# Altium PCB USB_Oscilloscope.PcbDoc (part 2 of 2)
Units mm, origin at the board's own origin, x right, y up, seen from the top; angles counter-clockwise.
Board outline 100 x 70 mm, 4 copper layers (SIG+PWR, Int1 (GND), Int2 (GND), SIG+PWR2), stack 1.369 mm thick; 112 components, 74 nets, 396 pads, 75 vias.
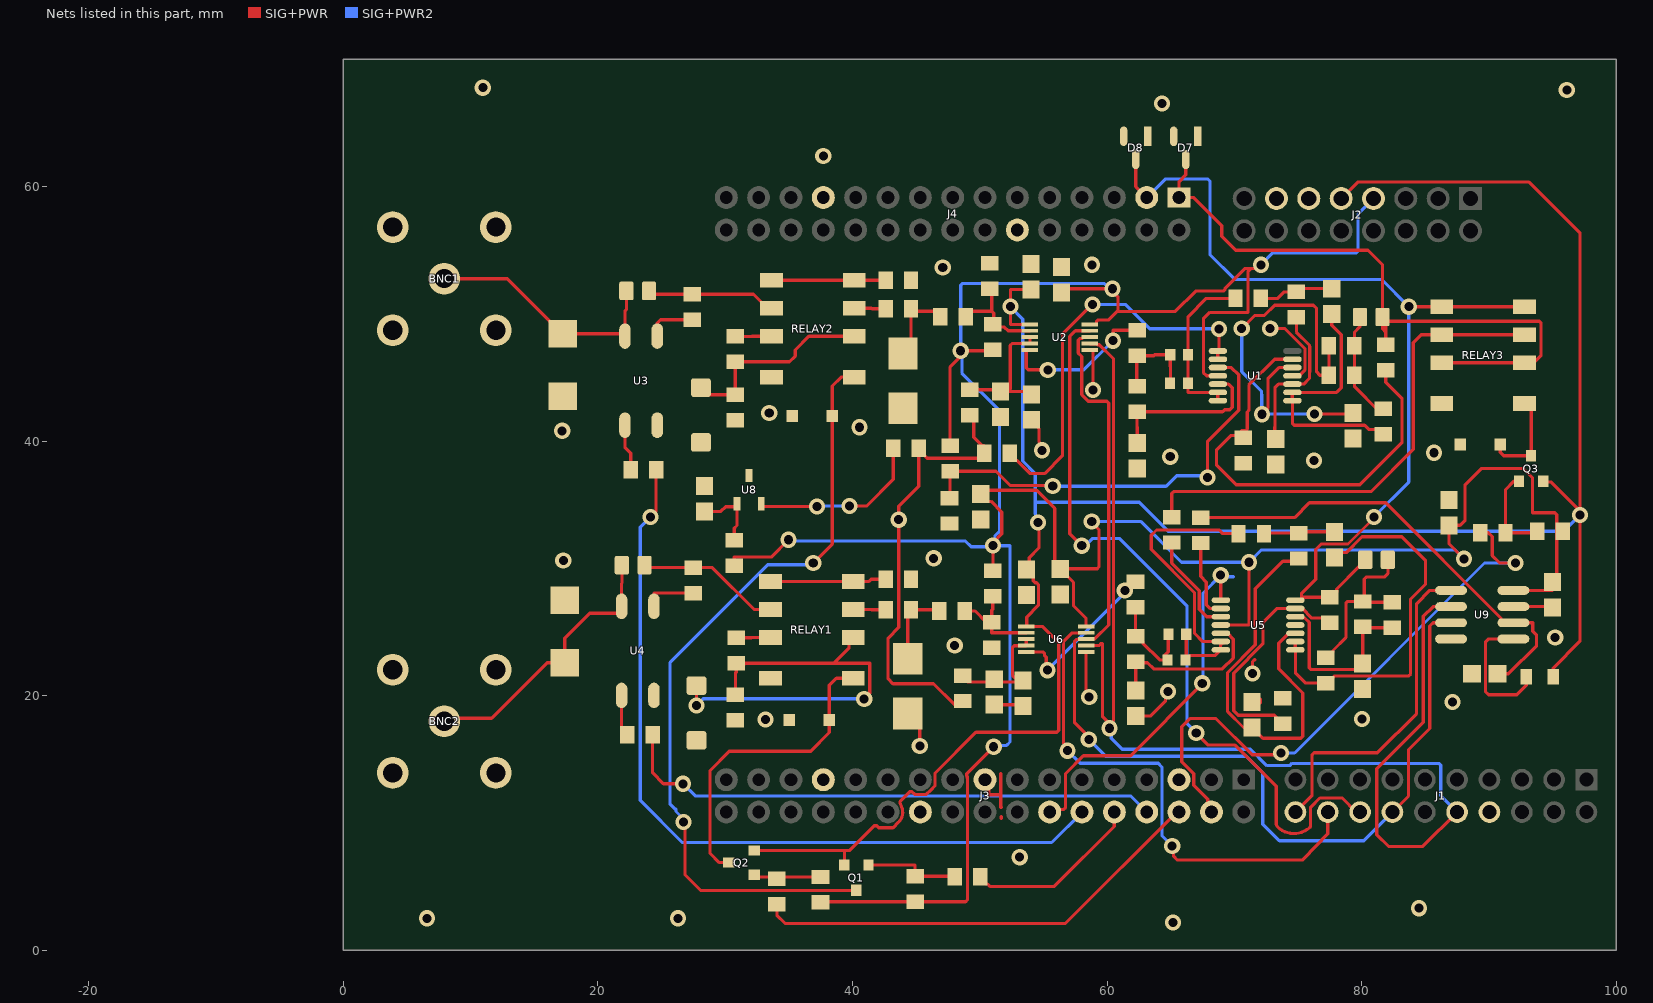
[diagram p4: the nets of this part, all layers, seen from the top]

## Part data (continued)
R17 R18 R36 R48: library part CMP-016-000011-1, "Type:Thick Film Resistor Resistance:34kΩ Tolerance:±1% Tolerance:±1% Power(Watts):125mW Voltage-Supply(Max):150V Temperature Coefficient:±100ppm/℃ Temperature Coefficient:±100ppm/℃ Operating Temperature:-55℃~+155℃ Operating Temperature:-55℃~+155℃", JLCPCB Part Class="Extended Part", LCSC Part Name="34kΩ ±1% 125mW 厚膜电阻", Manufacturer=FOJAN(富捷), Operating Temperature=-55℃~+155℃, Power(Watts)=125mW, Supplier Part Number=C2933420, Temperature Coefficient=±100ppm/℃, Tolerance=1%, Voltage-Supply(Max)=150V, AddInBom=yes, ConvertToPcb=yes, Datasheet=https://item.szlcsc.com/datasheet/FRC0805F3402TS/3279522.html, Design Item ID=FRC0805F3402TS, Device=FRC0805F3402TS, FootprintName=R0805, Manufacturer Part Number=FRC0805F3402TS, ModelId=b83c7c5430874b8eb2319a65d9433429聨0819f05c4eef4c71ace90d822a990e87, ModelName=R0805_L2.0-W1.3-H0.6, ModelTransform=78.74,51.181,0,0,0,0,0,-0.0005,0, Source=P1.SCHLIB, Supplier Footprint=0805, Symbol=FRC0805F3402TS, Type="Thick Film Resistor"
R19 R28 R30 R34 R37 R40 R41 R43 R45: library part CMP-016-000002-1, "Type:Thick Film Resistor Resistance:10kΩ Tolerance:±1% Tolerance:±1% Power(Watts):125mW Voltage-Supply(Max):150V Temperature Coefficient:±100ppm/℃ Temperature Coefficient:±100ppm/℃ Operating Temperature:-55℃~+155℃ Operating Temperature:-55℃~+155℃", JLCPCB Part Class="Basic Part", LCSC Part Name="10kΩ ±1% 125mW 厚膜电阻", Manufacturer=UNI-ROYAL(厚声), Manufacturer Part Number=0805W8F1002T5E, Operating Temperature=-55℃~+155℃, Power(Watts)=125mW, Supplier Part Number=C17414, Temperature Coefficient=±100ppm/℃, Tolerance=1%, Voltage-Supply(Max)=150V, AddInBom=yes, ConvertToPcb=yes, Datasheet=https://item.szlcsc.com/datasheet/0805W8F1002T5E/18102.html, Design Item ID=0805W8F1002T5E, Device=0805W8F1002T5E, FootprintName=R0805, ModelId=b83c7c5430874b8eb2319a65d9433429聨0819f05c4eef4c71ace90d822a990e87, ModelName=R0805_L2.0-W1.3-H0.6, ModelTransform=78.74,51.181,0,0,0,0,0,-0.0005,0, Source=P1.SCHLIB, Supplier Footprint=0805, Symbol=0805W8F1002T5E, Type="Thick Film Resistor"
R26 R27: library part CMP-016-000010-1, "Type:Thick Film Resistor Resistance:3.01kΩ Tolerance:±1% Tolerance:±1% Power(Watts):125mW Voltage-Supply(Max):150V Temperature Coefficient:±100ppm/℃ Temperature Coefficient:±100ppm/℃ Operating Temperature:-55℃~+155℃ Operating Temperature:-55℃~+155℃", JLCPCB Part Class="Extended Part", LCSC Part Name="3.01kΩ ±1% 125mW 厚膜电阻", Manufacturer=FOJAN(富捷), Manufacturer Part Number=FRC0805F3011TS, Operating Temperature=-55℃~+155℃, Power(Watts)=125mW, Supplier Part Number=C2999485, Temperature Coefficient=±100ppm/℃, Tolerance=1%, Voltage-Supply(Max)=150V, AddInBom=yes, ConvertToPcb=yes, Datasheet=https://item.szlcsc.com/datasheet/FRC0805F3011TS/3476925.html, Design Item ID=FRC0805F3011TS, Device=FRC0805F3011TS, FootprintName=R0805, ModelId=b83c7c5430874b8eb2319a65d9433429聨0819f05c4eef4c71ace90d822a990e87, ModelName=R0805_L2.0-W1.3-H0.6, ModelTransform=78.74,51.181,0,0,0,0,0,-0.0005,0, Source=P1.SCHLIB, Supplier Footprint=0805, Symbol=FRC0805F3011TS, Type="Thick Film Resistor"
R29 R33: library part CMP-016-000013-1, "Type:Thick Film Resistor Resistance:5.76kΩ Tolerance:±1% Tolerance:±1% Power(Watts):125mW Voltage-Supply(Max):150V Temperature Coefficient:±100ppm/℃ Temperature Coefficient:±100ppm/℃ Operating Temperature:-55℃~+155℃ Operating Temperature:-55℃~+155℃", JLCPCB Part Class="Extended Part", LCSC Part Name="5.76kΩ ±1% 125mW 厚膜电阻", Manufacturer=FOJAN(富捷), Manufacturer Part Number=FRC0805F5761TS, Operating Temperature=-55℃~+155℃, Power(Watts)=125mW, Supplier Part Number=C3000533, Temperature Coefficient=±100ppm/℃, Tolerance=1%, Voltage-Supply(Max)=150V, AddInBom=yes, ConvertToPcb=yes, Design Item ID=FRC0805F5761TS, Device=FRC0805F5761TS, FootprintName=R0805, ModelId=b83c7c5430874b8eb2319a65d9433429聨0819f05c4eef4c71ace90d822a990e87, ModelName=R0805_L2.0-W1.3-H0.6, ModelTransform=78.74,51.181,0,0,0,0,0,-0.0005,0, Source=P1.SCHLIB, Supplier Footprint=0805, Symbol=FRC0805F5761TS, Type="Thick Film Resistor"
R31 R35: library part CMP-016-000005-1, "Type:Thick Film Resistors Resistance:20kΩ Tolerance:±1% Tolerance:±1% Power(Watts): Overload Voltage (Max): Temperature Coefficient:±100ppm/℃ Temperature Coefficient:±100ppm/℃ Operating Temperature Range:-55℃~+155℃ Operating Temperature Range:-55℃~+155℃", JLCPCB Part Class="Basic Part", LCSC Part Name="20kΩ ±1% 125mW 厚膜电阻", Manufacturer=UNI-ROYAL(厚声), Manufacturer Part Number=0805W8F2002T5E, Operating Temperature Range=-55℃~+155℃, Supplier Part Number=C4328, Temperature Coefficient=±100ppm/℃, Tolerance=1%, AddInBom=yes, ConvertToPcb=yes, Datasheet=https://atta.szlcsc.com/upload/public/pdf/source/20200306/C422600_1E6D84923E4A46A82E41ADD87F860B5C.pdf, Design Item ID=0805W8F2002T5E, Device=0805W8F2002T5E, FootprintName=R0805, ModelId=b83c7c5430874b8eb2319a65d9433429聨0819f05c4eef4c71ace90d822a990e87, ModelName=R0805_L2.0-W1.3-H0.6, ModelTransform=78.74,51.181,0,0,0,0,0,-0.0005,0, Source=P1.SCHLIB, Supplier Footprint=0805, Symbol=0805W8F2002T5E, Type="Thick Film Resistors"
R38 R39 R52: library part CMP-016-000018-1, "Type:Thick Film Resistor Resistance:0Ω Tolerance:±1% Tolerance:±1% Power(Watts):125mW Voltage-Supply(Max):150V Temperature Coefficient:±800ppm/℃ Temperature Coefficient:±800ppm/℃ Operating Temperature:-55℃~+155℃ Operating Temperature:-55℃~+155℃", JLCPCB Part Class="Basic Part", LCSC Part Name="0Ω ±1% 125mW 厚膜电阻", Manufacturer=UNI-ROYAL(厚声), Manufacturer Part Number=0805W8F0000T5E, Operating Temperature=-55℃~+155℃, Power(Watts)=125mW, Supplier Part Number=C17477, Temperature Coefficient=±800ppm/℃, Tolerance=1%, Voltage-Supply(Max)=150V, AddInBom=yes, ConvertToPcb=yes, Datasheet=https://item.szlcsc.com/datasheet/0805W8F0000T5E/18165.html, Design Item ID=0805W8F0000T5E_C17477, Device=0805W8F0000T5E_C17477, FootprintName=R0805, ModelId=b83c7c5430874b8eb2319a65d9433429聨0819f05c4eef4c71ace90d822a990e87, ModelName=R0805_L2.0-W1.3-H0.6, ModelTransform=78.74,51.181,0,0,0,0,0,-0.0005,0, Source=P1.SCHLIB, Supplier Footprint=0805, Symbol=0805W8F0000T5E, Type="Thick Film Resistor"
R51: library part CMP-00006-1, "125mW Thin Film Resistor ±50ppm/℃ ±1% 5.1kΩ 0805 Chip Resistor - Surface Mount ROHS", Case Code (Imperial)=0805, Manufacturer Package Identifier="0805 (2012 metric)", Max Operating Temperature=155°C, Max Power Dissipation=125mW, Min Operating Temperature=-55°C, Temperature Coefficient=50ppm/°C, Tolerance=1%, Voltage Rating=150V, Case/Package=0805, China RoHS=Non-Compliant, Composition="Thin Film", Contact Plating=Tin, Depth=1.25mm, Height=500µm, Lead Free="Lead Free", Length=2mm, Lifecycle Status=Production, Military Standard=Not, Mounting Technology="Surface Mount", Number of Terminals=2, Number of Terminations=2, Power Rating=125mW, Radiation Hardening=No, REACH SVHC=Yes, RoHS=Compliant, Termination=SMD/SMT, Voltage Rating (DC)=150V, Width=1.25mm, Working Voltage=150V
RELAY1 RELAY2 RELAY3: library part CMP-006-000000-2, "Coil Voltage:5V Contact Form:2 Form C: 2C (DPDT-CO) Number of Pins:8 Contact Rating:1A@30VDC；300mA@125VAC Switching Voltage(Max):250V@AC；220V@DC Contact Material:AgNi + Gold plated Coil Rated Power:140mW Coil Resistance:178Ω Switching Current(Max):2A Oper", Coil Rated Power=140mW, Coil Resistance=178Ω, Coil Voltage=5V, Contact Rating=1A@30VDC；300mA@125VAC, Contact Resistance=100mΩ, JLCPCB Part Class="Extended Part", LCSC Part Name="超小型5V继电器 双刀双掷", Manufacturer=HF(宏发), Operating Temperature=-40℃~+85℃, Supplier Part Number=C64399, Switching Current(Max)=2A, Switching Voltage(Max)=250V@AC；220V@DC, AddInBom=yes, Coil Type="Polarized-Single Coil", Contact Form="2 Form C: 2C (DPDT-CO)", Contact Material="AgNi + Gold plated", ConvertToPcb=yes, Datasheet=https://item.szlcsc.com/datasheet/HFD4%252F5-SR/65466.html, Design Item ID=HFD4/5-SR, Device=HFD4/5-SR, FootprintName=RELAY-SMD_HFD4-5-SR, Manufacturer Part Number=HFD4/5-SR, ModelId=abc4320b17a04819849f22b1ebcd3fe7聨0819f05c4eef4c71ace90d822a990e87, ModelName=RELAY-SMD_L10.0-W6.5-H5.7-LS7.5-P2.2, ModelTransform=393.7,307.086,0,0,0,0,-0.005,0,0, Number of Pins=8, Operate Time=3ms, Release Time=3ms, Source=P1.SCHLIB, Supplier Footprint=SMD,10x6.5mm, Symbol=HFD4/5-S
U1 U5: library part CMP-00002-9, "Operational Amplifier, 4 Func, 5000uV Offset-Max, CMOS, PDSO14", Case/Package=TSSOP, Input Offset Voltage (Vos)=5mV, Max Operating Temperature=125°C, Max Supply Current=48mA, Max Supply Voltage=7V, Min Operating Temperature=-40°C, Nominal Supply Voltage (DC)=3V, Temperature Grade=Automotive, Common Mode Rejection Ratio=45dB, GAIN=120Meg, Height - Seated (Max)=1.2mm, Length=4.96mm, Number of Circuits=4, Number of Terminals=14, RoHS=Compliant, Slew Rate=160V/µs, Terminal Pitch=650µm, Unity Gain Bandwidth Product=120MHz, Width=4.4mm
U2 U6: library part CMP-008-000000-1, "Amplifier Type:PGA Number of Channels:2 Rail to Rail:Rail-to-Rail Input；Rail-to-Rail Output Output Current:60mA Current - Supply:1.1mA Operating Temperature:-40℃~+125℃ Operating Temperature:-40℃~+125℃ Vos - Input Offset Voltage:100uV Input Offset Voltage", Current - Supply=1.1mA, Ib - Input Bias Current=5000pA, Input Offset Current(Ios)=5nA, Input Offset Voltage Drift(Vos TC)=1.2uV/℃, JLCPCB Part Class="Extended Part", LCSC Part Name=零漂移可编程增益放大器, Manufacturer=TI(德州仪器), Operating Temperature=-40℃~+125℃, Output Current=60mA, Quiescent Current=1100000nA, Supplier Part Number=C2057394, Vos - Input Offset Voltage=100uV, AddInBom=yes, Amplifier Type=PGA, ConvertToPcb=yes, Datasheet=https://www.ti.com/cn/lit/gpn/pga112, Design Item ID=PGA113AIDGSR, Device=PGA113AIDGSR, FootprintName=VSSOP-10_L3.0-W3.0-P0.50-LS4.9-BL, Manufacturer Part Number=PGA113AIDGSR, ModelId=3e31ed6b36ca484795e6a68c51b575dc聨0819f05c4eef4c71ace90d822a990e87, ModelName=VSSOP-10_L3.0-W3.0-H1.1-LS4.9-P0.50, ModelTransform=197.637,118.11,0,90,0,0,0,0,0, Number of Channels=2, Rail to Rail="Rail-to-Rail Input；Rail-to-Rail Output", Single Supply=2.2V~5.5V, Source=PGA113AIDGSR.SCHLIB, Supplier Footprint=VSSOP-10-0.5mm, Symbol=PGA113AIDGSR
U3 U4: library part CMP-006-000003-2, "Contact Form:SPST-NO(1 Form A) Load Current:500mA Load Voltage:60V Load Voltage:60V Voltage - Forward(Vf):1.25V Forward Current(If):50mA RDS(on):850mΩ Isolation Voltage(Vrms):1.5kV Turn-on time:900us Turn-off time:500us Input Type:AC,DC Operating Temperat", Forward Current(If)=50mA, Insulation Resistance=1000MΩ, Isolation Voltage(Vrms)=1.5kV, JLCPCB Part Class="Extended Part", LCSC Part Name="1 Form A(SPSTNO) 负载AC,DC 负载电压60V", Load Current=500mA, Load Voltage=60V, Manufacturer=PANASONIC(松下), Operating Temperature=-40℃~+85℃, Supplier Part Number=C250827, Total Power Dissipation(Pd)=350mW, Voltage - Forward(Vf)=1.25V, AddInBom=yes, Contact Form="SPST-NO(1 Form A)", ConvertToPcb=yes, Datasheet=https://item.szlcsc.com/datasheet/AQY282SX/246604.html, Design Item ID=AQY282SX, Device=AQY282SX, FootprintName=SOP-4_L4.3-W4.4-P2.54-LS7.0-BL, Input Type=AC,DC, Manufacturer Part Number=AQY282SX, ModelId=43a8e8732de74b24a167faf554c5dad4聨0819f05c4eef4c71ace90d822a990e87, ModelName=SOP-4_L4.4-W4.6-H2.1-LS7.0-P2.54, ModelTransform=173.228,283.69762,0,0,0,0,0,0.005,0, RDS(on)=850mΩ, Source=P1.SCHLIB, Supplier Footprint=SOP-4-2.54mm, Symbol=AQY282SX, Turn-off time=500us, Turn-on time=900us
U8: library part CMP-010-000000-2, JLCPCB Part Class="Extended Part", Manufacturer=TI(德州仪器), Supplier Part Number=C54120489, AddInBom=yes, ConvertToPcb=yes, Design Item ID=REF3016EAIDBZR, Device=REF3016EAIDBZR, FootprintName=SOT-23-3_L3.0-W1.7-P0.95-LS2.9-BR, LCSC Part Name=REF3016EAIDBZR, Manufacturer Part Number=REF3016EAIDBZR, ModelId=4eed685bb9f4439b846746bc2193f3c0ÂŽ0819f05c4eef4c71ace90d822a990e87, ModelName=SOT-23-3L_L2.9-W1.6-H1.1-LS2.8-P0.95, ModelTransform=114.173,110.236,0,90,0,0,0,0,0, Source=schematic.SCHLIB, Supplier Footprint=SOT-23-3, Symbol=REF3016EAIDBZR
U9: library part CMP-0188-00466-2, "Single/Dual Digital Potentiometer with SPI Interface, 8-Pin SOIC 150mil, Industrial Temperature, Tape and Reel", Code_IPC=SOIC127P600-8, Code_JEDEC=MS-012, ComponentLink1Description="Manufacturer URL", ComponentLink1URL=http://www.microchip.com/, ComponentLink2Description=Datasheet, ComponentLink2URL=http://ww1.microchip.com/downloads/en/DeviceDoc/11195c.pdf, ComponentLink3Description="Package Specification", ComponentLink3URL=http://www.microchip.com/stellent/groups/techpub_sg/documents/packagingspec/en012702.pdf, DatasheetVersion=Jul-2003, PackageDescription="8-Lead Plastic Small Outline (SN) - Narrow, 3.90mm Body [SOIC]", PackageReference=SOIC-SN8, PackageVersion="revBB, Aug-2009", RevisionNote="URLs added."

## Via types
v1: diameter 1.27, hole 0.711, SIG+PWR to SIG+PWR2, 75 vias

## Nets (pads, with @x,y where several pads share a name; then routed paths per layer and width w, separated by ;. In a path a pad name is that pad's centre, name@x,y a point inside that pad or via, vN(x,y) a via of type N, cw(c..) or ccw(c..) an arc to the next point about the centre after c; other vN are vias at no path point)
+1V625: R32.1 R38.1 R39.1 R50.1 | length 35.2
  SIG+PWR w0.254: R39.1@45.209,39.44 R39.1@45.209,39.131 ; R50.1@48.58,19.34 47.981,19.34 46.366,20.955 43.18,20.955 42.799,21.336 42.799,24.536 43.63,25.367 43.63,34.88 45.209,36.459 R39.1@45.209,39.131 ; R32.1@49.21,42.086 49.519,41.777 49.519,40.301 50.189,39.631 50.311,39.631 R38.1@50.75,39.192 ; R38.1@50.75,39.07 50.34,38.66 45.867,38.66 45.396,39.131 R39.1@45.209,39.131
  other v1: 43.63,33.83
+3V3: C10.1 C22.1 C25.1 C27.1 C29.1 J2.7 R29.1 R33.1 R37.1 R41.2 R43.2 R45.2 R52.2 U1.4 U2.10 U5.4 U6.10 U9.8 | length 253.5
  SIG+PWR w0.254: R52.2@30.72,30.23 30.72,30.898 33.616,30.898 v1(34.976,32.258) ; R43.2@37.161,3.819 44.359,3.819 R41.2@44.92,3.829 48.884,3.829 49.032,3.978 49.032,13.413 ccw(c47.88,13.413) 48.973,13.777 ; R37.1@47.67,39.629 47.67,45.83 v1@48.91,47.07 ; v1(48.5,47.1) 50.92,47.1 R29.1@51.01,47.19 ; 48.973,13.778 48.973,13.883 v1(51.09,16) ; C25.1@50.07,35.842 50.07,35.811 C25.1@50.331,35.551 ; R33.1@51.02,29.829 51.047,29.856 51.047,31.726 v1@51.08,31.759 ; v1(51.047,31.792) 51.047,32.037 51.73,32.72 51.73,34.42 50.886,35.264 50.617,35.264 C25.1@50.331,35.551 ; C22.1@56.32,29.94 57.358,28.901 57.358,27.06 58.349,26.069 U6.10@58.349,25.448 ; C10.1@56.42,51.658 56.732,51.97 v1(60.41,51.97) 60.41,51.763 60.86,51.313 60.86,50.21 ; U2.10@58.64,49.168 59.14,49.168 59.163,49.191 59.163,49.371 59.312,49.52 60.12,49.52 60.79,50.19 65.36,50.19 66.959,51.789 69.114,51.789 69.263,51.937 69.263,52.003 70.81,53.55 71.279,53.55 ; v1(58.792,33.699) 58.792,33.619 59.365,33.046 59.365,30.119 59.216,29.97 C22.1@56.32,29.97 55.88,30.41 55.88,34.72 54.46,36.14 50.617,36.14 50.331,35.853 C25.1@50.331,35.551 ; U1.4@68.705,45.13 67.818,45.13 67.564,45.384 67.564,49.606 68.072,50.114 71.069,50.114 71.069,53.34 71.279,53.55 ; U5.4@68.935,25.56 71.15,25.56 v1(71.15,30.49) ; v1(72.085,53.848) 71.81,53.848 71.512,53.55 71.279,53.55 ; v1(88.03,30.76) 86.85,31.94 C27.1@86.85,33.39 87.721,33.39 88.113,33.782 88.113,36.576 89.383,37.846 92.704,37.846 93.41,37.14 93.41,34.378 95.161,34.378 95.31,34.229 R45.2@95.31,32.92 ; U9.8@91.91,28.275 94.99,28.275 C29.1@94.99,28.952 95.31,29.272 R45.2@95.31,32.92 ; R45.2@95.769,32.92 R45.2@95.31,32.92
  SIG+PWR2 w0.254: v1(34.976,32.258) 35.074,32.16 48.86,32.16 49.321,31.699 49.729,31.699 ; 49.73,31.7 v1@50.545,31.7 ; v1@50.546,31.699 50.954,31.699 v1(51.047,31.792) ; v1(51.09,16) 51.196,16.106 52.106,16.106 52.37,16.37 52.37,31.792 v1(51.047,31.792) ; v1(58.792,33.699) 62.631,33.699 65.84,30.49 v1(71.15,30.49) 72.11,31.45 87.34,31.45 v1(88.03,30.76) ; v1(60.41,51.97) 60.173,51.97 59.753,52.39 48.649,52.39 48.5,52.241 v1(48.5,47.1) 48.594,47.006 48.594,45.346 51.557,42.383 51.557,32.937 51.194,32.574 51.194,31.939 v1(51.047,31.792) ; v1(72.085,53.848) 73.025,54.788 79.561,54.788 79.71,54.937 79.71,57.85 J2.7@80.92,59.06
+5V: C9.2 C21.2 J2.9 Q1.2 Q2.2 Q3.2 R51.2 U2.1 U6.1 | length 178.3
  SIG+PWR w0.254: Q2.2@32.29,7.86 39.38,7.86 ; Q1.2@39.38,6.999 39.38,7.86 ; 43.739,11.598 43.858,11.302 cw(c42.79,10.87) 43.605,10.055 43.193,9.643 42.061,9.643 41.917,9.787 41.707,9.787 39.78,7.86 39.38,7.86 ; 43.739,11.599 43.739,11.705 44.495,12.461 44.601,12.461 44.676,12.461 44.879,12.258 45.33,12.258 45.807,12.258 46.145,12.595 46.482,12.933 46.482,13.41 46.482,13.926 49.696,17.14 56.052,17.14 56.201,17.289 56.201,24.169 54.922,25.448 U6.1@53.68,25.448 ; U6.1@53.65,25.448 U6.1@53.68,25.448 ; U2.1@53.941,49.168 52.42,49.168 v1(52.42,50.57) 52.42,51.9 C9.2@54.01,51.9 ; v1(54.57,33.616) 54.648,33.538 54.648,31.62 53.885,30.857 53.885,30.125 C21.2@53.68,29.92 54.194,29.406 54.194,29.024 54.343,28.875 54.459,28.875 54.606,28.728 54.606,27.109 53.68,26.183 U6.1@53.68,25.448 ; J2.9@78.38,59.06 79.67,60.35 93.142,60.35 97.13,56.363 97.13,38.379 97.13,34.519 v1(97.13,34.188) 97.13,24.28 ; Q3.2@94.25,36.85 94.312,36.788 94.882,36.788 96.935,34.735 96.935,34.658 97.074,34.519 v1@97.151,34.519 ; R51.2@95.03,21.49 95.03,22.18 97.13,24.28 ; 97.13,24.274 97.13,24.28
  SIG+PWR2 w0.254: v1(52.42,50.57) 52.42,50.533 53.37,49.583 53.37,38.443 54.36,37.453 ; 54.36,37.333 54.36,35.21 ; v1(54.57,33.616) 54.376,33.81 54.376,34.257 54.36,34.272 54.36,35.21 ; v1(97.13,34.188) 95.871,32.93 64.8,32.93 62.52,35.21 54.36,35.21
ATTEN_SEL_CH1: D3.2 Q1.3 RELAY2.1 | length 62.2
  SIG+PWR w0.254: v1(26.74,10.08) 26.846,9.974 26.846,5.934 28.07,4.71 Q1.3@40.3,4.71 ; v1(36.92,30.42) 38.415,31.915 D3.2@38.415,41.96 38.415,44.329 39.116,45.03 RELAY2.1@40.139,45.03
  SIG+PWR2 w0.254: v1(26.74,10.08) 26.74,10.313 26.138,10.915 26.138,11.094 26.066,11.094 25.674,11.486 25.674,22.624 33.34,30.29 36.79,30.29 v1(36.92,30.42)
ATTEN_SEL_CH2: D6.2 Q2.3 RELAY1.1 | length 24.7
  SIG+PWR w0.254: Q2.3@30.29,6.9 29.55,6.9 28.809,7.641 28.809,10.867 cw(c30.09,10.87) 28.81,10.93 28.809,13.409 cw(c30.09,13.41) 28.81,13.47 28.81,14.13 30.33,15.65 36.72,15.65 38.185,17.115 D6.2@38.185,18.1 38.185,20.828 38.737,21.38 RELAY1.1@40.059,21.38
CS1_: J1.16 U2.9 | length 59.8
  SIG+PWR w0.254: v1(58.01,31.79) 57.07,32.73 57.07,48.224 57.514,48.668 U2.9@58.64,48.668 ; v1(67,17.08) 67.949,16.131 70.053,16.131 73.286,12.898 73.286,11.178 73.286,9.94 73.286,9.883 73.31,9.832 ccw(c73.54,9.94) 73.336,9.788 ccw(c74.406,10.592) 73.735,9.435 ccw(c74.676,11.058) 75.894,9.631 ccw(c75.728,9.823) 75.982,9.823 75.982,11.242 76.712,11.972 78.478,11.972 79.58,10.87 J1.16@79.87,10.87
  SIG+PWR2 w0.254: v1(58.01,31.79) 58.285,31.79 58.855,32.36 60.96,32.36 66.28,27.04 66.28,17.8 v1(67,17.08)
CS2_: J1.18 U6.9 | length 40.9
  SIG+PWR w0.254: v1(56.89,15.69) 56.89,15.965 56.58,16.275 56.58,24.288 57.217,24.925 58.327,24.925 U6.9@58.349,24.948 ; v1(65.11,8.2) 65.221,8.089 65.221,7.383 65.49,7.114 75.36,7.114 75.435,7.188 ccw(c75.255,7.368) 75.438,7.192 77.322,9.157 77.322,9.258 J1.18@77.33,10.87
  SIG+PWR2 w0.254: v1(56.89,15.69) 57.879,14.701 64.009,14.701 64.31,14.4 64.31,9 v1(65.11,8.2)
CS3_: J1.20 U9.1 | length 26.4
  SIG+PWR w0.254: J1.20@74.79,10.87 76.098,12.178 76.098,15.371 76.247,15.52 81.22,15.52 84.303,18.603 84.303,27.234 85.344,28.275 U9.1@87.01,28.275
DIO: J1.14 U2.8 U6.8 U9.3 | length 84.6
  SIG+PWR w0.254: v1(58.56,16.58) 58.56,16.777 57.43,17.907 57.43,24.25 57.607,24.427 58.327,24.427 58.372,24.473 59.031,24.473 60.121,25.563 60.121,42.991 59.972,43.14 58.522,43.14 58.003,43.659 58.003,46.649 57.737,46.915 57.737,47.924 57.885,48.071 57.967,48.071 58.041,48.071 58.139,48.17 U2.8@58.64,48.17 ; J1.14@82.41,10.87 83.668,12.128 83.668,15.758 85.344,17.434 85.344,25.481 85.598,25.735 U9.3@87.01,25.735
  SIG+PWR2 w0.254: v1(58.56,16.58) 59.89,15.25 70.934,15.25 72.23,13.954 72.23,9.91 73.53,8.61 80.15,8.61 J1.14@82.41,10.87
GND: BNC1.2 BNC1.3 BNC1.4 BNC1.5 BNC2.2 BNC2.3 BNC2.4 BNC2.5 C2.2 C4.1 C7.1 C8.2 C9.1 C10.2 C12.2 C16.1 C17.1 C18.2 C19.2 C20.1 C21.1 C22.2 C23.2 C24.1 C25.2 C26.1 C27.2 C28.2 C29.2 D1.2 D2.1 D3.1 D4.1 D5.2 D6.1 D7.1 D7.2 D8.1 D8.2 D9.1 J1.8 J2.11 J2.13 J3.5 J3.17 J3.22 J3.27 J4.12 J4.23 R1.1 R4.1 R7.1 R10.1 R19.1 R28.1 R31.2 R35.2 R40.2 RELAY1.8 RELAY2.8 RELAY3.8 U1.11 U2.6 U3.2 U4.2 U5.11 U6.6 U8.3 U9.4 U9.7 | length 39
  SIG+PWR w0.254: D4.1@44.35,18.61 45.29,18.61 v1(45.29,16.07) ; J3.17@50.41,13.41 50.71,13.41 50.71,12.22 51.63,12.22 51.63,13.89 51.64,13.89 51.64,11.25 51.68,11.25 ; C23.2@51.13,19.299 53.4,19.299 C24.1@53.4,19.199 ; 51.66,10.53 51.68,10.51 51.68,10.38 51.71,10.38 ; C20.1@54.07,41.679 54.617,41.132 54.617,40.995 54.66,40.953 54.66,39.936 54.685,39.91 54.685,39.473 v1(54.88,39.279) ; U6.6@58.349,23.449 58.349,19.9 v1(58.59,19.9) ; U2.6@58.64,47.169 58.89,47.169 v1(58.89,44.027) ; C16.1@62.25,18.408 63.388,18.408 64.596,19.616 64.596,20.156 v1(64.79,20.35) ; C17.1@70.97,19.5 C17.1@71.482,19.5 ; C17.1@71.413,19.43 72.037,19.43 C17.1@72.037,19.74 ; v1@71.482,21.8 v1(71.422,21.74) 71.422,22.691 71.571,22.84 71.6,22.84 ; v1(72.806,48.84) 73.97,48.84 75.532,47.278 75.532,45.582 75.08,45.13 U1.11@74.555,45.13 ; U5.11@74.26,25.56 U5.11@74.785,25.56 ; U9.7@91.91,27.005 94.99,27.005 C29.2@94.99,26.95
  other v1: 65.178,2.185 6.588,2.524 26.308,2.525 84.5,3.32 53.135,7.322 33.18,18.14 80.023,18.188 87.12,19.52 48.03,23.95 95.19,24.57 17.289,30.62 46.38,30.8 76.25,38.48 64.96,38.78 85.67,39.09 17.2,40.81 40.56,41.09 33.466,42.201 47.09,53.63 58.81,53.85 37.71,62.4 64.3,66.53 96.103,67.59 10.967,67.762
NetBNC1_1: BNC1.1 C1.1 D1.1 U3.4 | length 19.6
  SIG+PWR w0.254: BNC1.1@7.94,52.76 12.9,52.76 16.237,49.423 16.237,49.373 17.19,48.42 D1.1@17.24,48.42 17.24,48.438 U3.4@22.13,48.438 ; U3.4@22.13,48.25 U3.4@22.13,48.438 ; C1.1@22.245,51.8 22.245,50.331 22.13,50.216 U3.4@22.13,48.438
NetBNC2_1: BNC2.1 C11.1 D5.1 U4.4 | length 22.4
  SIG+PWR w0.254: BNC2.1@7.94,18 8.17,18.23 11.657,18.23 16.027,22.6 D5.1@17.4,22.6 17.4,24.536 19.356,26.492 21.87,26.492 U4.4@21.87,27.03 21.87,28.829 21.89,28.849 C11.1@21.89,30.26
NetC1_2: C1.2 R2.2 RELAY2.6 | length 10.3
  SIG+PWR w0.254: C1.2@24.02,51.8 24.02,51.529 R2.2@27.41,51.529 32.226,51.529 33.325,50.43 RELAY2.6@33.641,50.43
NetC2_1: C2.1 R3.1 R4.2 RELAY2.2 | length 16.3
  SIG+PWR w0.254: C2.1@28.1,44.2 28.1,43.64 R4.2@30.785,43.64 ; R4.2@30.81,43.64 R4.2@30.785,43.64 ; RELAY2.2@40.139,48.231 36.578,48.231 35.504,47.157 35.504,46.678 35.056,46.23 R3.1@30.81,46.23 30.785,46.23 R4.2@30.785,43.64
NetC3_1: C3.1 C13.1 R12.2 R13.1 | length 7.3
  SIG+PWR w0.254: R13.1@62.35,44.299 62.332,44.299 62.332,46.709 R12.2@62.35,46.709 63.658,46.709 63.729,46.78 C3.1@64.96,46.78 64.96,45.885 64.973,45.872 64.973,44.56 C13.1@64.949,44.56
NetC3_2: C3.2 C13.2 R14.2 U1.6 U1.7 | length 13.3
  SIG+PWR w0.254: U1.7@68.705,43.18 68.682,43.18 U1.6@68.682,43.83 ; U1.6@68.705,43.83 U1.6@68.682,43.83 ; R14.2@70.081,51.21 67.786,51.21 66.36,49.784 C3.2@66.36,46.78 66.36,46.736 66.349,46.736 C13.2@66.349,44.56 66.349,43.83 U1.6@68.682,43.83
NetC4_2: C4.2 R13.2 U1.5 | length 12.8
  SIG+PWR w0.254: C4.2@62.36,39.852 62.36,41.094 62.35,41.104 R13.2@62.35,42.3 69.067,42.3 69.239,42.473 69.625,42.473 69.822,42.669 69.822,44.199 69.541,44.48 U1.5@68.705,44.48
NetC5_1: C5.1 R14.1 R15.1 | length 6.1
  SIG+PWR w0.254: R14.1@72.08,51.21 73.406,51.21 73.915,51.719 R15.1@74.87,51.719 74.87,51.994 77.64,51.994 C5.1@77.64,51.97
NetC5_2: C5.2 R16.2 U1.8 U1.9 | length 20
  SIG+PWR w0.254: U1.8@74.549,43.18 74.549,43.83 U1.9@74.555,43.83 78.018,43.83 78.384,44.196 78.384,48.362 77.64,49.106 C5.2@77.64,49.969 ; U1.8@74.555,43.18 74.555,41.395 74.704,41.246 80.219,41.246 80.545,40.92 81.299,40.92 R16.2@81.67,40.549
NetC6_2: C6.2 R16.1 R17.1 R18.1 | length 8.8
  SIG+PWR w0.254: C6.2@79.855,49.75 79.855,48.969 79.42,48.534 R17.1@79.42,47.51 79.42,46.355 79.426,46.349 79.426,45.18 R18.1@79.42,45.18 79.42,44.299 81.35,42.369 81.491,42.369 R16.1@81.67,42.548
NetC7_2: C7.2 R15.2 U1.10 | length 11.9
  SIG+PWR w0.254: C7.2@73.17,40.552 73.17,41.097 73.177,41.097 73.177,44.203 73.454,44.48 U1.10@74.555,44.48 75.438,44.48 75.895,44.937 75.895,45.41 75.911,45.425 75.911,47.435 75.895,47.45 75.895,47.54 74.87,48.565 R15.2@74.87,49.72
NetC8_1: C8.1 R17.2 R18.2 U1.12 | length 35
  SIG+PWR w0.254: v1(70.57,48.84) 71.599,49.869 72.35,49.869 73.154,50.673 ; v1(72.161,42.113) 72.644,42.596 72.644,44.933 73.491,45.78 U1.12@74.555,45.78 ; 73.18,50.673 76.2,50.673 76.454,50.419 76.454,45.434 76.708,45.18 R18.2@77.421,45.18 R17.2@77.421,47.51 ; v1(76.3,42.133) 79.232,42.133 C8.1@79.32,42.222
  SIG+PWR2 w0.254: v1(70.57,48.84) 70.57,45.46 72.131,43.899 72.131,43.663 72.136,43.659 72.136,42.139 v1(72.161,42.113) 72.171,42.123 76.29,42.123 v1(76.3,42.133)
NetC11_2: C11.2 R9.2 RELAY1.6 | length 11.4
  SIG+PWR w0.254: C11.2@23.665,30.26 23.665,30.069 R9.2@27.48,30.069 28.995,30.069 32.283,26.78 RELAY1.6@33.561,26.78
NetC12_1: C12.1 R10.2 R11.1 RELAY1.2 | length 34.7
  SIG+PWR w0.254: v1(27.75,19.228) C12.1@27.75,20.8 ; R10.2@30.81,20.071 30.81,21.743 ; 30.81,21.769 30.878,21.837 30.878,22.112 31.012,22.246 31.288,22.246 31.593,22.552 ; 30.86,21.855 R11.1@30.86,22.552 31.593,22.552 ; RELAY1.2@40.059,24.581 39.733,24.255 39.733,23.773 38.515,22.555 ; v1(40.919,19.761) 41.351,20.193 41.351,22.555 38.515,22.555 ; 31.593,22.552 33.938,22.552 33.938,22.555 33.941,22.555 38.515,22.555
  SIG+PWR2 w0.254: v1(27.75,19.228) 28.283,19.761 v1(40.919,19.761)
NetC14_1: C14.1 R23.2 R24.1 | length 5.7
  SIG+PWR w0.254: R23.2@72.32,32.74 72.36,32.78 R24.1@75.04,32.78 75.04,32.88 C14.1@77.87,32.88
NetC14_2: C14.2 R25.2 U5.8 U5.9 | length 30.1
  SIG+PWR w0.254: U5.9@74.785,24.26 74.778,24.26 74.778,23.61 U5.8@74.785,23.61 74.785,21.805 75.591,20.999 77.302,20.999 77.863,21.56 83.681,21.56 83.83,21.709 83.83,27.6 85.01,28.78 85.01,30.613 83.133,32.49 80.02,32.49 78.777,31.247 78.238,31.247 C14.2@77.87,30.878
NetC15_2: C15.2 R25.1 R36.1 R48.1 | length 13.5
  SIG+PWR w0.254: R25.1@77.18,22.998 77.302,22.998 77.741,23.438 77.741,23.56 78.752,24.57 78.752,27.26 78.901,27.409 R48.1@80.08,27.409 80.08,27.348 R36.1@82.39,27.348 ; R48.1@80.201,27.539 80.201,29.175 80.35,29.324 81.775,29.324 82.05,29.599 C15.2@82.05,30.68
NetC16_2: C16.2 R22.2 U5.5 | length 13.2
  SIG+PWR w0.254: C16.2@62.25,20.41 R22.2@62.25,22.69 62.341,22.599 63.171,22.599 63.662,22.108 69.058,22.108 69.912,22.962 69.912,24.458 69.46,24.91 U5.5@68.935,24.91
NetC17_2: C17.2 R24.2 U5.10 | length 31.5
  SIG+PWR w0.254: U5.10@74.785,24.91 74.26,24.91 73.48,24.13 73.48,22.11 75.37,20.22 75.37,16.809 75.221,16.66 72.239,16.66 C17.2@71.39,17.509 70.711,17.509 69.46,18.76 69.46,21.832 71.64,24.012 71.64,28.41 73.805,30.575 74.834,30.575 R24.2@75.04,30.781
NetC18_1: C18.1 R36.2 R48.2 U5.12 | length 14.8
  SIG+PWR w0.254: U5.12@74.785,26.21 75.338,26.21 75.436,26.112 75.522,26.112 75.87,25.764 75.87,22.209 76.019,22.06 80.08,22.06 R48.2@80.08,25.41 80.08,25.349 R36.2@82.39,25.349
NetC19_1: C19.1 C20.2 R32.2 U2.3 U2.4 | length 10.6
  SIG+PWR w0.254: R32.2@49.21,44.029 C19.1@51.991,44.029 ; U2.3@53.941,48.17 U2.4@53.941,47.67 52.549,47.67 52.4,47.521 52.4,44.122 52.18,43.902 53.849,43.902 C20.2@54.07,43.681
NetC26_2: C26.2 R52.1 U8.1 | length 5.6
  SIG+PWR w0.254: C26.2@28.39,34.478 29.667,34.478 30.038,34.849 U8.1@30.93,34.849 ; R52.1@30.72,32.229 30.72,33.166 30.93,33.376 U8.1@30.93,34.849 ; U8.1@30.93,35.09 U8.1@30.93,34.849
NetC28_1: C28.1 R49.1 U9.6 | length 36.5
  SIG+PWR w0.254: R49.1@67.35,33.999 74.726,33.999 75.887,35.16 81.876,35.16 90.925,26.112 90.925,25.941 91.131,25.735 93.427,25.735 93.427,25.066 93.726,24.767 93.726,23.94 91.516,21.73 C28.1@90.67,21.73
NetC30_1: C30.1 C31.1 R21.1 R22.1 | length 7.5
  SIG+PWR w0.254: R21.1@62.23,26.97 62.23,24.689 62.372,24.689 62.811,24.25 62.811,24.128 64.119,22.82 64.742,22.82 C31.1@64.752,22.81 ; C31.1@64.475,23.136 64.801,23.462 C30.1@64.801,24.82
NetC30_2: C30.2 C31.2 R23.1 U5.6 U5.7 | length 25.1
  SIG+PWR w0.254: C30.2@66.21,24.85 C31.2@66.21,22.869 ; U5.6@68.91,24.136 68.91,23.61 U5.7@68.935,23.61 68.497,23.172 66.514,23.172 C31.2@66.21,22.869 ; U5.6@68.999,24.095 U5.6@69.163,24.158 ; U5.6@69.533,24.301 69.53,24.298 68.972,24.298 U5.6@68.935,24.26 67.52,24.26 66.863,24.917 66.863,28.102 63.46,31.505 63.46,32.601 63.879,33.02 68.81,33.02 69.09,32.74 R23.1@70.321,32.74 ; C31.2@66.21,22.869 66.21,22.81 C31.2@66.151,22.81 C31.2@66.21,22.869
NetQ1_1: Q1.1 R41.1 R42.2 | length 7.7
  SIG+PWR w0.254: Q1.1@41.25,6.71 44.92,6.71 R41.1@44.92,5.828 48.049,5.828 R42.2@48.049,5.78
NetQ2_1: Q2.1 R43.1 R44.2 | length 5.3
  SIG+PWR w0.254: Q2.1@32.29,5.95 32.461,5.779 34.88,5.779 R43.1@37.49,5.779
NetQ3_1: Q3.1 R45.1 R46.2 | length 7.2
  SIG+PWR w0.254: Q3.1@92.35,36.85 91.948,36.85 91.29,36.192 R46.2@91.29,32.81 93.66,32.81 R45.1@93.77,32.92
NetR1_2: R1.2 RELAY2.4 RELAY2.5 | length 9
  SIG+PWR w0.254: RELAY2.5@33.641,52.63 RELAY2.4@40.139,52.63 42.6,52.63 R1.2@42.6,52.65
NetR2_1: R2.1 U3.3 | length 3.9
  SIG+PWR w0.254: U3.3@24.67,48.25 24.67,49.276 24.924,49.53 R2.1@27.41,49.53
NetR3_2: R3.2 RELAY2.7 | length 2.8
  SIG+PWR w0.254: R3.2@30.81,48.229 32.129,48.229 32.131,48.231 RELAY2.7@33.641,48.231
NetR5_2: R5.2 RELAY2.3 | length 2.5
  SIG+PWR w0.254: RELAY2.3@40.139,50.43 41.499,50.43 41.529,50.4 R5.2@42.6,50.4
NetR6_2: R6.2 U3.1 | length 3.7
  SIG+PWR w0.254: U3.1@22.13,41.25 22.13,39.516 22.581,39.065 R6.2@22.581,37.75
NetR7_2: R7.2 RELAY1.4 RELAY1.5 | length 9.1
  SIG+PWR w0.254: RELAY1.5@33.561,28.98 RELAY1.4@40.059,28.98 41.308,28.98 41.478,29.15 R7.2@42.6,29.15
NetR8_2: R8.2 RELAY1.3 | length 2.5
  SIG+PWR w0.254: RELAY1.3@40.059,26.78 41.483,26.78 41.504,26.76 R8.2@42.6,26.76
NetR9_1: R9.1 U4.3 | length 4.1
  SIG+PWR w0.254: U4.3@24.41,27.03 24.41,28.07 R9.1@27.48,28.07
NetR11_2: R11.2 RELAY1.7 | length 2.7
  SIG+PWR w0.254: R11.2@30.86,24.551 32.076,24.551 32.106,24.581 RELAY1.7@33.561,24.581
NetR19_2: R19.2 R26.1 U1.13 | length 35
  SIG+PWR w0.254: U1.13@74.555,46.43 73.152,46.43 71.138,44.416 71.138,42.417 71.005,42.285 71.005,40.948 70.879,40.822 70.555,40.822 70.555,40.575 70.429,40.449 69.74,40.449 68.585,39.294 68.585,38.145 70.15,36.58 79.852,36.58 83.17,39.898 83.17,43.323 81.88,44.613 R26.1@81.88,45.56
NetR20_2: R20.2 U4.1 | length 3.5
  SIG+PWR w0.254: U4.1@21.87,20.03 21.87,16.95 R20.2@22.3,16.95
NetR27_2: R27.2 R28.2 U5.13 | length 18.3
  SIG+PWR w0.254: R28.2@73.8,17.809 73.143,18.466 70.294,18.466 69.944,18.816 69.944,21.779 72.24,24.076 72.24,25.74 73.36,26.86 U5.13@74.785,26.86 75.31,26.86 76.07,26.1 77.109,26.1 R27.2@77.47,25.739
NetR29_2: R29.2 R30.1 R31.1 U2.2 | length 7.9
  SIG+PWR w0.254: R30.1@49.179,50.2 50.943,50.2 ; R31.1@50.79,51.97 50.943,51.817 50.943,50.2 ; U2.2@53.941,48.668 52.222,48.668 51.931,48.959 51.24,48.959 R29.2@51.01,49.189 51.2,49.379 51.091,49.488 51.091,50.051 50.943,50.2
NetR33_2: R33.2 R34.1 R35.1 U6.2 | length 8.1
  SIG+PWR w0.254: R34.1@48.829,26.66 49.632,26.66 50.503,25.789 R35.1@50.94,25.789 ; R33.2@51.02,27.83 51.02,26.797 50.94,26.717 R35.1@50.94,25.789 ; U6.2@53.65,24.948 50.94,24.948 R35.1@50.94,25.789
NetR37_2: R37.2 R40.1 U1.3 | length 34.2
  SIG+PWR w0.254: R40.1@47.62,35.529 47.67,35.529 R37.2@47.67,37.63 51.273,37.63 52.384,36.519 55.701,36.519 v1(55.73,36.49) ; v1(67.88,37.15) 67.88,39.965 70.333,42.418 70.333,45.212 69.765,45.78 U1.3@68.705,45.78
  SIG+PWR2 w0.254: v1(55.73,36.49) 55.77,36.45 64.63,36.45 65.46,37.28 67.75,37.28 v1(67.88,37.15)
NetR38_2: R38.2 U1.1 U1.2 | length 32
  SIG+PWR w0.254: R38.2@52.351,39.05 52.351,38.928 52.79,38.489 52.912,38.489 53.951,37.45 55.09,37.45 56.49,38.85 56.49,48.39 v1(58.84,50.74) ; v1(68.78,48.82) 68.78,47.155 U1.1@68.705,47.08 68.682,47.08 68.682,46.43 U1.2@68.705,46.43 U1.2@69.215,46.43
  SIG+PWR2 w0.254: v1(58.84,50.74) 61.428,50.74 63.348,48.82 v1(68.78,48.82)
NetR39_2: R39.2 U8.2 | length 13.8
  SIG+PWR w0.254: U8.2@32.83,35.09 32.83,35.008 32.968,34.87 v1(37.22,34.87) ; v1(39.76,34.9) 41.1,34.9 43.21,37.01 R39.2@43.21,39.44
  SIG+PWR2 w0.254: v1(37.22,34.87) 37.25,34.9 v1(39.76,34.9)
NetR47_1: R47.1 RELAY3.3 RELAY3.6 | length 39.6
  SIG+PWR w0.254: R47.1@65.08,34.038 65.08,35.894 65.229,36.043 80.723,36.043 84.04,39.36 84.04,47.72 84.68,48.36 RELAY3.6@86.281,48.36 RELAY3.3@92.779,48.36
NetR47_2: R47.2 U5.3 | length 8.1
  SIG+PWR w0.254: R47.2@65.08,32.039 65.08,30.421 67.242,28.259 67.242,26.786 67.818,26.21 U5.3@68.935,26.21
NetR49_2: R49.2 U5.2 | length 6.3
  SIG+PWR w0.254: R49.2@67.35,32 67.35,29.373 67.793,28.931 67.793,27.139 68.072,26.86 U5.2@68.935,26.86
NetR51_1: R51.1 U9.5 | length 10.5
  SIG+PWR w0.254: U9.5@91.91,24.465 89.969,24.465 89.713,24.209 89.713,20.338 89.969,20.083 92.185,20.083 92.93,20.828 R51.1@92.93,21.49
SCLK: J1.10 U2.7 U6.7 U9.2 | length 100.6
  SIG+PWR w0.254: U6.7@58.349,23.95 59.381,23.95 59.542,24.111 ; U2.7@58.64,47.67 58.662,47.647 59.163,47.647 59.238,47.571 59.394,47.571 60.5,46.465 60.5,18.045 60.18,17.725 v1(60.18,17.45) 59.986,17.644 59.986,18.041 59.631,18.396 59.631,24.111 ; U9.2@87.01,27.005 85.598,27.005 84.836,26.243 84.836,17.926 81.178,14.268 81.178,9.093 82.102,8.17 84.79,8.17 J1.10@87.49,10.87
  SIG+PWR2 w0.254: v1(60.18,17.45) 60.324,17.306 60.324,16.665 61.179,15.81 71.26,15.81 72.55,14.52 74.342,14.52 74.512,14.69 86.051,14.69 86.2,14.541 86.2,12.16 J1.10@87.49,10.87
SIGNAL_ATTEN_SEL_CH1: J3.10 R42.1 | length 14
  SIG+PWR w0.254: R42.1@50.048,5.78 50.048,5.658 50.488,5.219 50.61,5.219 50.798,5.03 55.86,5.03 60.567,9.737 60.567,10.867 J3.10@60.57,10.87
SIGNAL_ATTEN_SEL_CH2: J3.6 R44.1 | length 36.4
  SIG+PWR w0.254: R44.1@34.07,3.64 34.07,2.75 34.7,2.12 56.73,2.12 65.48,10.87 J3.6@65.65,10.87
SIGNAL_CH1_CLAMPED: D2.2 R5.1 R30.2 | length 6.4
  SIG+PWR w0.254: D2.2@43.97,46.89 44.599,46.89 R5.1@44.599,50.278 ; R5.1@44.799,50.2 R30.2@47.18,50.2
SIGNAL_CH2_CLAMPED: D4.2 R8.1 R34.2 | length 6.4
  SIG+PWR w0.254: D4.2@44.35,22.91 44.35,26.76 R8.1@44.599,26.76 46.83,26.76 R34.2@46.83,26.66
SIGNAL_COUPLING_CH1: J3.12 R6.1 | length 63.5
  SIG+PWR w0.254: v1(24.13,34.036) 24.58,34.486 R6.1@24.58,37.75
  SIG+PWR2 w0.254: v1(24.13,34.036) 23.33,33.236 23.33,11.79 26.64,8.48 55.64,8.48 J3.12@58.03,10.87
SIGNAL_COUPLING_CH2: J3.8 R20.1 | length 43.1
  SIG+PWR w0.254: R20.1@24.299,16.95 24.299,13.943 25.152,13.09 v1(26.69,13.09)
  SIG+PWR2 w0.254: v1(26.69,13.09) 27.64,12.14 46.76,12.14 46.76,12.12 54.25,12.12 54.26,12.13 61.85,12.13 J3.8@63.11,10.87
SIGNAL_LPF_CH1_IN: R12.1 U2.5 | length 12.2
  SIG+PWR w0.254: U2.5@53.941,47.169 53.663,47.169 53.64,47.146 53.64,45.749 53.789,45.6 v1(55.34,45.6) ; v1(60.46,47.89) 60.46,48.708 R12.1@62.35,48.708
  SIG+PWR2 w0.254: v1(55.34,45.6) 58.17,45.6 v1(60.46,47.89)
SIGNAL_LPF_CH1_OUT: C6.1 D7.3 J4.1 R26.2 RELAY3.2 RELAY3.7 | length 52.3
  SIG+PWR w0.254: D7.3@66.18,62.12 66.18,60.906 65.65,60.376 J4.1@65.65,59.13 66.802,59.13 69.012,56.92 69.012,56.083 70.104,54.991 80.487,54.991 81.63,53.848 C6.1@81.63,49.75 ; R26.2@81.88,47.559 81.88,48.565 ; C6.1@81.88,49.42 81.88,48.565 ; RELAY3.7@86.281,46.161 RELAY3.2@92.779,46.161 93.506,46.161 94.082,46.736 94.082,49.271 93.933,49.42 81.96,49.42 C6.1@81.63,49.75 ; C6.1@81.63,49.75 81.63,48.815 81.88,48.565
SIGNAL_LPF_CH2_IN: R21.2 U6.5 | length 12.8
  SIG+PWR w0.254: U6.5@53.65,23.449 54.941,23.449 55.09,23.3 55.09,23.153 55.217,23.026 55.217,22.107 v1(55.314,22.01) ; v1(61.387,28.281) 61.542,28.281 R21.2@62.23,28.969
  SIG+PWR2 w0.254: v1(55.314,22.01) 61.387,28.083 v1(61.387,28.281)
SIGNAL_LPF_CH2_OUT: C15.1 D8.3 J4.3 R27.1 RELAY3.4 RELAY3.5 U5.14 | length 75.4
  SIG+PWR w0.254: D8.3@62.25,62.13 62.25,59.99 J4.3@63.11,59.13 ; U5.14@75.274,27.51 75.274,27.738 ; C15.1@80.275,30.68 80.275,30.525 79.841,30.09 79.731,30.09 78.031,28.39 78.031,28.178 77.592,27.738 75.274,27.738 ; v1(80.96,34.05) 80.96,33.966 78.917,31.923 76.813,31.923 76.38,31.49 76.38,29.16 75.274,28.054 75.274,27.738 ; v1(83.693,50.56) RELAY3.5@86.281,50.56 RELAY3.4@92.779,50.56
  SIG+PWR2 w0.254: J4.3@63.11,59.13 64.56,60.58 67.923,60.58 68.072,60.431 68.072,54.658 70.025,52.705 81.548,52.705 v1(83.693,50.56) 83.693,36.783 v1(80.96,34.05)
SIGNAL_TRIG_INPUT: J3.14 U5.1 | length 30
  SIG+PWR w0.254: J3.14@55.49,10.87 55.693,11.073 56.591,11.073 56.74,11.222 56.74,13.9 58.14,15.3 61.84,15.3 67.47,20.93 v1(67.47,20.98) ; v1(68.92,29.47) 68.92,27.525 U5.1@68.935,27.51
  SIG+PWR2 w0.254: v1@67.53,20.82 67.53,22.63 67.53,28.06 v1@68.93,29.46 ; v1(68.92,29.47) v1@68.93,29.46 ; 69.936,29.353 69.037,29.353 v1@68.93,29.46
SIGNAL_TRIG_SEL: J3.4 R46.1 | length 46.2
  SIG+PWR w0.254: J3.4@68.19,10.87 67.898,11.162 67.898,11.882 66.802,12.978 66.802,13.887 65.87,14.82 65.87,17.58 66.5,18.21 68.552,18.21 71.392,15.37 73.52,15.37 v1(73.66,15.51) ; R46.1@89.291,32.81 89.948,32.81 90.246,32.512 90.246,31.014 90.83,30.43 v1(92.07,30.43)
  SIG+PWR2 w0.254: v1(73.66,15.51) 74.72,15.51 89.64,30.43 v1(92.07,30.43)
TRIG_SEL: D9.2 Q3.3 RELAY3.1 | length 7.8
  SIG+PWR w0.254: D9.2@90.885,39.74 90.885,39.116 91.151,38.85 Q3.3@93.3,38.85 93.32,38.85 93.32,42.96 RELAY3.1@92.779,42.96
VREF_1.65: C23.1 C24.2 R50.2 U6.3 U6.4 | length 9.3
  SIG+PWR w0.254: R50.2@48.61,21.54 49.049,21.101 49.264,21.101 49.29,21.075 50.513,21.075 50.52,21.082 53.11,21.082 52.563,21.629 52.563,21.806 52.56,21.808 52.56,23.778 52.709,23.927 53.628,23.927 U6.4@53.65,23.95 U6.3@53.65,24.45
pads on no net: J1.1 J1.2 J1.3 J1.4 J1.5 J1.6 J1.7 J1.9 J1.11 J1.12 J1.13 J1.15 J1.17 J1.19 J2.1 J2.2 J2.3 J2.4 J2.5 J2.6 J2.8 J2.10 J2.12 J2.14 J2.15 J2.16 J3.1 J3.2 J3.3 J3.7 J3.9 J3.11 J3.13 J3.15 J3.16 J3.18 J3.19 J3.20 J3.21 J3.23 J3.24 J3.25 J3.26 J3.28 J3.29 J3.30 J3.31 J3.32 J3.33 J3.34 J4.2 J4.4 J4.5 J4.6 J4.7 J4.8 J4.9 J4.10 J4.11 J4.13 J4.14 J4.15 J4.16 J4.17 J4.18 J4.19 J4.20 J4.21 J4.22 J4.24 J4.25 J4.26 J4.27 J4.28 J4.29 J4.30 U1.14

## Polygon pours and split planes (outlines as drawn)
GND on SIG+PWR2 "GND_L04_P002" (solid, pour order 2): 0,70 0.13,0.49 100,0 100,70
GND on SIG+PWR "GND_L01_P000" (solid, pour order 0): 100,0 100,70 0.44,70.44 0.44,0.44
GND on Int2 (GND) (split plane): 99.49,0.51 0.51,0.51 0.51,69.49 99.49,69.49
GND on Int1 (GND) (split plane): 99.49,0.51 0.51,0.51 0.51,69.49 99.49,69.49

## Silkscreen, mask and mechanical layers (free items; w line width, h text height)
Top Overlay:
  text "+3V3" at 80.237,63.68 h1.52 r270
  text "+5V" at 77.657,63.29 h1.52 r270
  text "CS3" at 74.167,9.31 h1.52 r270
  text "CS2" at 76.957,9.31 h1.52 r270
  text "CS1" at 79.367,9.31 h1.52 r270
  text "DIO" at 82.007,9.31 h1.52 r270
  text "SCLK" at 87.127,9.31 h1.52 r270
  text "GND" at 89.487,9.31 h1.52 r270